# Altium PCB PCB_prob_2024-08-21.pcbdoc
Units mil, origin at the board's own origin, x right, y up, seen from the top; angles counter-clockwise.
Board outline 12910 x 4910 mil, 2 copper layers (Top Layer, Bottom Layer); 57 components, 36 nets, 213 pads, 16 vias.
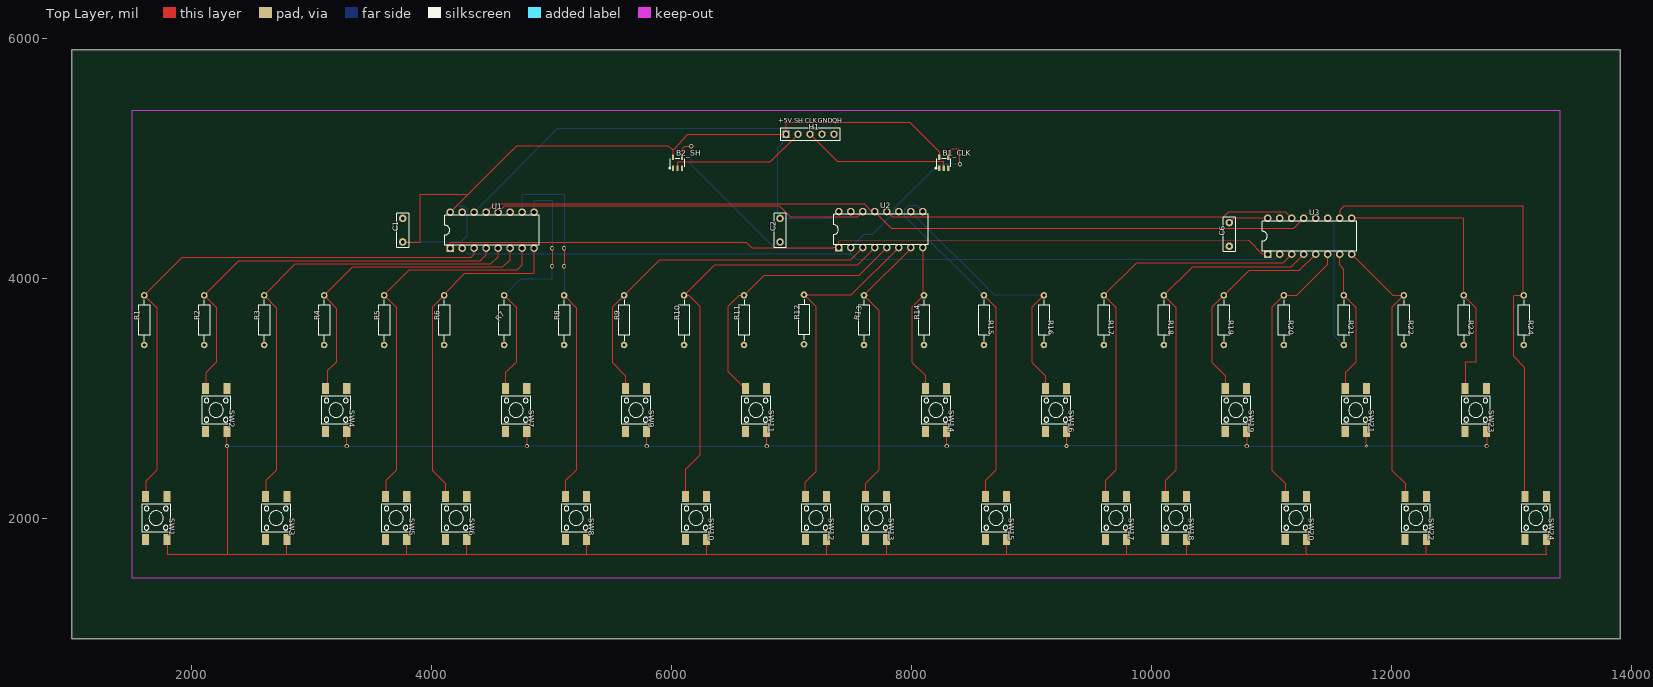
[diagram p0: Top Layer view]
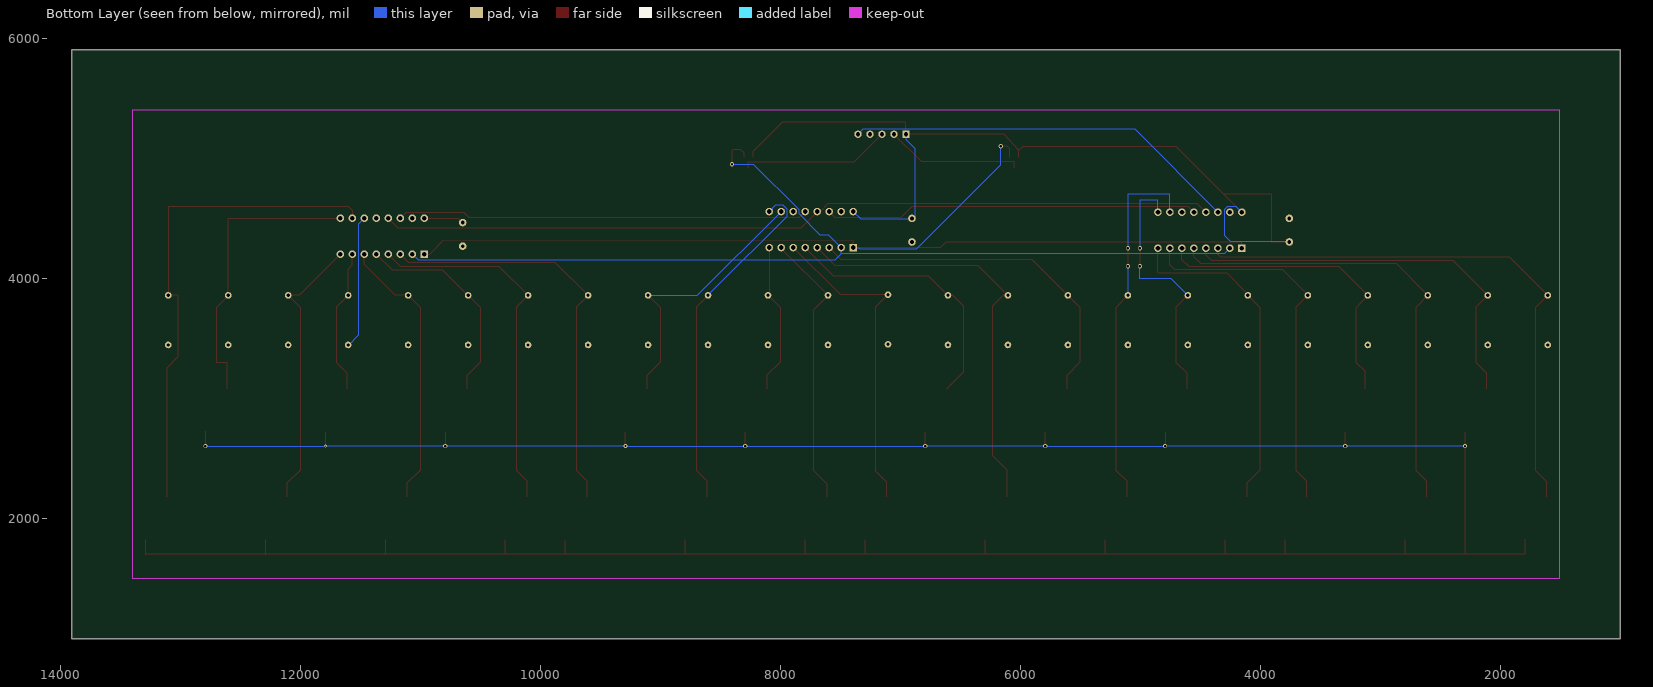
[diagram p1: Bottom Layer view, seen from below]

## Layer stack, top to bottom
Top Layer: signal copper (thickness not stored)
Dielectric: dielectric 12.6, FR-4, Dk 4.8
Bottom Layer: signal copper (thickness not stored)

## Board outline
13910,1000 1000,1000 1000,5910 13910,5910

## Components (designator, comment, footprint, x,y, rotation, side; value= is the part's Value field where it differs from the comment)
B1_CLK "SN74LVC1G125DBVR" SOT-23-5_L3.0-W1.7-P0.95-LS2.8-BL 8270,4967.2 r0 top
B2_SH "SN74LVC1G125DBVR" SOT-23-5_L3.0-W1.7-P0.95-LS2.8-BL 6050.66,4967.2 r0 top
C1 "100nF" CAP-TH_L7.2-W2.5-P5.00-D0.5 3760,4405 r90 top
C2 "100nF" CAP-TH_L7.2-W2.5-P5.00-D0.5 6905,4405 r90 top
C6 "100nF" CAP-TH_L7.2-W2.5-P5.00-D0.5 10650,4370 r90 top
H1 "HDR-F-2.54_1x5" HDR-F-2.54_1X5 7155,5205 r0 top
R1 "110kΩ" RES-TH_BD2.3-L6.5-P10.50-D0.5 1605,3655 r90 top
R2 "110kΩ" RES-TH_BD2.3-L6.5-P10.50-D0.5 2105,3655 r90 top
R3 "110kΩ" RES-TH_BD2.3-L6.5-P10.50-D0.5 2605,3655 r90 top
R4 "110kΩ" RES-TH_BD2.3-L6.5-P10.50-D0.5 3105,3655 r90 top
R5 "110kΩ" RES-TH_BD2.3-L6.5-P10.50-D0.5 3605,3655 r90 top
R6 "110kΩ" RES-TH_BD2.3-L6.5-P10.50-D0.5 4105,3655 r90 top
R7 "110kΩ" RES-TH_BD2.3-L6.5-P10.50-D0.5 4605,3655 r90 top
R8 "110kΩ" RES-TH_BD2.3-L6.5-P10.50-D0.5 5104.99,3655 r90 top
R9 "110kΩ" RES-TH_BD2.3-L6.5-P10.50-D0.5 5605,3655 r270 top
R10 "110kΩ" RES-TH_BD2.3-L6.5-P10.50-D0.5 6105,3655 r270 top
R11 "110kΩ" RES-TH_BD2.3-L6.5-P10.50-D0.5 6605,3655 r270 top
R12 "110kΩ" RES-TH_BD2.3-L6.5-P10.50-D0.5 7105,3660 r270 top
R13 "110kΩ" RES-TH_BD2.3-L6.5-P10.50-D0.5 7605,3655 r270 top
R14 "110kΩ" RES-TH_BD2.3-L6.5-P10.50-D0.5 8105,3655 r270 top
R15 "110kΩ" RES-TH_BD2.3-L6.5-P10.50-D0.5 8605,3655 r270 top
R16 "110kΩ" RES-TH_BD2.3-L6.5-P10.50-D0.5 9105,3655 r270 top
R17 "110kΩ" RES-TH_BD2.3-L6.5-P10.50-D0.5 9605,3655 r270 top
R18 "110kΩ" RES-TH_BD2.3-L6.5-P10.50-D0.5 10105,3655 r270 top
R19 "110kΩ" RES-TH_BD2.3-L6.5-P10.50-D0.5 10605,3655 r270 top
R20 "110kΩ" RES-TH_BD2.3-L6.5-P10.50-D0.5 11105,3655 r270 top
R21 "110kΩ" RES-TH_BD2.3-L6.5-P10.50-D0.5 11604.98,3655 r270 top
R22 "110kΩ" RES-TH_BD2.3-L6.5-P10.50-D0.5 12104.98,3655 r270 top
R23 "110kΩ" RES-TH_BD2.3-L6.5-P10.50-D0.5 12604.98,3655 r270 top
R24 "110kΩ" RES-TH_BD2.3-L6.5-P10.50-D0.5 13104.98,3655 r270 top
SW1 "SW" SW-SMD_4P-L6.0-W6.0-P4.50-LS9.0-2 1705,2005 r270 top
SW2 "SW" SW-SMD_4P-L6.0-W6.0-P4.50-LS9.0-2 2205,2905 r270 top
SW3 "SW" SW-SMD_4P-L6.0-W6.0-P4.50-LS9.0-2 2705,2005 r270 top
SW4 "SW" SW-SMD_4P-L6.0-W6.0-P4.50-LS9.0-2 3205,2905 r270 top
SW5 "SW" SW-SMD_4P-L6.0-W6.0-P4.50-LS9.0-2 3705,2005 r270 top
SW6 "SW" SW-SMD_4P-L6.0-W6.0-P4.50-LS9.0-2 4205,2005 r270 top
SW7 "SW" SW-SMD_4P-L6.0-W6.0-P4.50-LS9.0-2 4705,2905 r270 top
SW8 "SW" SW-SMD_4P-L6.0-W6.0-P4.50-LS9.0-2 5205,2005 r270 top
SW9 "SW" SW-SMD_4P-L6.0-W6.0-P4.50-LS9.0-2 5705,2905 r270 top
SW10 "SW" SW-SMD_4P-L6.0-W6.0-P4.50-LS9.0-2 6205,2005 r270 top
SW11 "SW" SW-SMD_4P-L6.0-W6.0-P4.50-LS9.0-2 6705,2905 r270 top
SW12 "SW" SW-SMD_4P-L6.0-W6.0-P4.50-LS9.0-2 7205,2005 r270 top
SW13 "SW" SW-SMD_4P-L6.0-W6.0-P4.50-LS9.0-2 7705,2005 r270 top
SW14 "SW" SW-SMD_4P-L6.0-W6.0-P4.50-LS9.0-2 8205,2905 r270 top
SW15 "SW" SW-SMD_4P-L6.0-W6.0-P4.50-LS9.0-2 8705,2005 r270 top
SW16 "SW" SW-SMD_4P-L6.0-W6.0-P4.50-LS9.0-2 9205,2905 r270 top
SW17 "SW" SW-SMD_4P-L6.0-W6.0-P4.50-LS9.0-2 9705,2005 r270 top
SW18 "SW" SW-SMD_4P-L6.0-W6.0-P4.50-LS9.0-2 10205,2005 r270 top
SW19 "SW" SW-SMD_4P-L6.0-W6.0-P4.50-LS9.0-2 10705,2905 r270 top
SW20 "SW" SW-SMD_4P-L6.0-W6.0-P4.50-LS9.0-2 11205,2005 r270 top
SW21 "SW" SW-SMD_4P-L6.0-W6.0-P4.50-LS9.0-2 11704.98,2905 r270 top
SW22 "SW" SW-SMD_4P-L6.0-W6.0-P4.50-LS9.0-2 12204.98,2005 r270 top
SW23 "SW" SW-SMD_4P-L6.0-W6.0-P4.50-LS9.0-2 12704.98,2905 r270 top
SW24 "SW" SW-SMD_4P-L6.0-W6.0-P4.50-LS9.0-2 13204.98,2005 r270 top
U1 "SN74HC165N" DIP-16_L19.8-W6.5-P2.54-LS7.6-BL 4505,4405 r0 top
U2 "SN74HC165N" DIP-16_L19.8-W6.5-P2.54-LS7.6-BL 7745,4410 r0 top
U3 "SN74HC165N" DIP-16_L19.8-W6.5-P2.54-LS7.6-BL 11320,4355 r0 top

## Footprints (in the part's own frame and the unit in brackets; to place one, negate y for a bottom-side part, rotate by r counter-clockwise, add the part's x,y. Pads: shape width x height; smd on the part's side, far side on the other; paste and mask are expansions set on the pad)
CAP-TH_L7.2-W2.5-P5.00-D0.5 [mm]
  round 1.6 hole 0.8 paste+0 mask+0.05: 1(-2.5,0) 2(2.5,0)
  silkscreen extent -3.6,-1.25 3.6,1.25
DIP-16_L19.8-W6.5-P2.54-LS7.6-BL [mm]
  rect 1.6x1.6 hole 1 paste+0 mask+0.051: 1(-8.89,-3.81)
  round 1.6 hole 1 paste+0 mask+0.051: 2(-6.35,-3.81) 3(-3.81,-3.81) 4(-1.27,-3.81) 5(1.27,-3.81) 6(3.81,-3.81) 7(6.35,-3.81) 8(8.89,-3.81) 9(8.89,3.81) 10(6.35,3.81) 11(3.81,3.81) 12(1.27,3.81) 13(-1.27,3.81) 14(-3.81,3.81) 15(-6.35,3.81) 16(-8.89,3.81)
  silkscreen extent -10,-3.2 10,3.2
HDR-F-2.54_1X5 [mil]
  rect 62x62 hole 35 paste+0 mask+2: 1(-200,0)
  round 62 hole 35 paste+0 mask+2: 2(-100,0) 3(0,0) 4(100,0) 5(200,0)
  silkscreen extent -250,-50 250,50
RES-TH_BD2.3-L6.5-P10.50-D0.5 [mm]
  round 1.4 hole 0.7 paste+0 mask+0.051: 1(-5.25,0) 2(5.25,0)
  silkscreen extent -4.32,-1.15 4.32,1.15
SOT-23-5_L3.0-W1.7-P0.95-LS2.8-BL [mm]
  rect 0.49x1.157 smd paste+0 mask+0.051: 1(-0.95,-1.154) 2(0,-1.154) 3(0.95,-1.154)
  rect 0.49x1.175 smd paste+0 mask+0.051: 4(0.95,1.154) 5(-0.95,1.154)
  silkscreen extent -1.8,-1.29 1.53,0.85
SW-SMD_4P-L6.0-W6.0-P4.50-LS9.0-2 [mm]
  rect 2.3x1.5 smd paste+0 mask+0.051: 1(-4.55,2.25) 2(4.55,2.25) 3(-4.55,-2.25) 4(4.55,-2.25)
  silkscreen extent -3,-3 3,3

## Via types
v1: diameter 35.43, hole 19.69, Top Layer to Bottom Layer, tented both sides, 15 vias
v2: diameter 24.41, hole 12.2, Top Layer to Bottom Layer, tented both sides, 1 vias

## Nets (pads, with @x,y where several pads share a name; then routed paths per layer and width w, separated by ;. In a path a pad name is that pad's centre, name@x,y a point inside that pad or via, vN(x,y) a via of type N, cw(c..) or ccw(c..) an arc to the next point about the centre after c; other vN are vias at no path point)
CLK: B1_CLK.2 H1.3 | length 1263.5
  Top Layer w10: H1.3 7385,4975 8250,4975 8270,4975 B1_CLK.2
CLK_OUT: B1_CLK.4 U1.2 U2.2 U3.2 | length 8412.5
  Top Layer w10: B1_CLK.4 8307.39,5055 8340,5080 8395,5080 8405,5070 v1(8405,4955)
  Bottom Layer w10: U1.2 4303.08,4206.92 7495,4206.92 ; v1(8405,4955) 8227.1,4955 7850.56,4578 7850.56,4546.02 7673.48,4368.94 7603.94,4368.94 U2.2 7495,4206.92 ; U3.2 11022.56,4157.56 7544.36,4157.56 7495,4206.92
GND_PORT: B1_CLK.1 B1_CLK.3 B2_SH.1 B2_SH.3 C1.2 C2.1 C6.1 H1.4 R1.1 R2.1 R3.1 R4.1 R5.1 R6.1 R7.1 R8.1 R9.2 R10.2 R11.2 R12.2 R13.2 R14.2 R15.2 R16.2 R17.2 R18.2 R19.2 R20.2 R21.2 R22.2 R23.2 R24.2 U1.15 U2.11 U2.15 U3.11 U3.15 | length 1117.6
  Bottom Layer w10: U3.11 11520,4455.01 11520,3528.32 R21.2@11605,3443.31
QH: H1.5 U1.14 | length 3305.6
  Bottom Layer w10: U1.14 5048.94,5248.94 7311.06,5248.94 H1.5
QH#: U1.13 U2.13 U3.13 | length 6962.5
  Top Layer w10: U1.13 4525.42,4625.42 7606.21,4625.42 7671.63,4560 U2.13 7832.64,4422.36 11187.36,4422.36 U3.13
SH/LD#: B2_SH.2 H1.2 | length 1152.8
  Top Layer w10: B2_SH.2 6050.66,4975 6825,4975 H1.2
SH/LD#_OUT: B2_SH.4 U1.1 U2.1 U3.1 | length 8820.8
  Top Layer w10: U1.1 4155,4305 6623.7,4305 6668.7,4260 7350.6,4260 U2.1 7395,4315 10811.58,4319.03 10925.61,4205 U3.1 ; B2_SH.4 6088.06,5083.06 6110,5105 v1(6165,5105)
  Bottom Layer w10: v1(6165,5105) 6165,4949.8 6863.94,4250.86 7341.47,4250.86 7350.61,4260 U2.1
U1: R1.2 SW1.3 U1.3 | length 4702
  Top Layer w10: SW1.3 1616.42,2311.42 1710,2405 1710,3756.69 R1.2 1923.31,4180 4330,4180 4355,4205 U1.3
U1_11: U1.11
U2: R2.2 SW2.3 U1.4 | length 3400.8
  Top Layer w10: SW2.3 2116.42,3216.42 2205,3305 2205,3761.69 R2.2 2393.31,4150 4405,4150 4455,4200 U1.4
U2_14: U1.12 U2.14 | length 3118.7
  Top Layer w10: U1.12 4604.33,4604.33 6900.87,4604.33 6993.31,4511.89 7546.89,4511.89 U2.14
U3: R3.2 SW3.3 U1.5 | length 3909.7
  Top Layer w10: SW3.3 2616.4,2316.4 2705,2405 2705,3756.7 R3.2 2863.31,4125 4495,4125 4555,4185 U1.5
U3_12: U3.12
U3_14: U2.12 U3.14 | length 3432.1
  Top Layer w10: U2.12 7843.42,4511.58 10601.6,4511.58 10643.01,4552.99 11122.01,4552.99 U3.14
U4: R4.2 SW4.3 U1.6 | length 2616.2
  Top Layer w10: SW4.3@3131.41,3084.13 3131.41,3231.41 3205,3305 3205,3755 R4.2 3343.31,4100 4595,4100 4655,4160 U1.6
U5: R5.2 SW5.3 U1.7 | length 3155.6
  Top Layer w10: R5.2@3600,3861.69 3813.31,4075 4715,4075 4755,4115 U1.7 ; R5.2 3705,3761.69 3705,2405 3616.42,2316.42 SW5.3
U6: R6.2 SW6.3 U1.8 | length 2786.9
  Top Layer w10: R6.2 4005,3761.7 4005,2405 4116.42,2293.58 SW6.3 ; R6.2@4110,3876.69 4278.31,4045 4850,4045 4855,4050 U1.8
U7: R7.2 SW7.3 U1.9 | length 2218
  Top Layer w10: R7.2 4705,3761.68 4705,3305 4616.42,3216.42 SW7.3 ; v1(5005,4105) v1(5005,4255)
  Bottom Layer w10: R7.2 4743.3,4000 5005,4000 v1(5005,4105) ; U1.9 4855,4655 5005,4655 v1(5005,4255)
U8: R8.2 SW8.3 U1.10 | length 3097.6
  Top Layer w10: R8.2 5205,3756.68 5205,2405 5116.42,2316.42 SW8.3 ; v1(5105,4105) v1(5105,4255)
  Bottom Layer w10: U1.10 4755,4705 5105,4705 v1(5105,4255) ; R8.2 v1(5105,4105)
U9: R9.1 SW9.3 U2.3 | length 3019.9
  Top Layer w10: SW9.3 5616.42,3193.58 5505,3305 5505,3761.69 R9.1 5903.3,4160 7494.3,4160 U2.3
U10: R10.1 SW10.3 U2.4 | length 3558.6
  Top Layer w10: SW10.3 6115,2405 6115,2410 6235,2530 6235,3770 6143.3,3861.7 R10.1 6356.61,4113.3 7548.3,4113.3 U2.4
U11: R11.1 SW11.3 U2.5 | length 2267.4
  Top Layer w10: SW11.3 6475,3225.55 6475,3770 6566.69,3861.69 R11.1 6768.12,4024.81 7559.81,4024.81 U2.5
U12: R12.1 SW12.3 U2.6 | length 2715.5
  Top Layer w10: SW12.3 7115,2185.55 7115,2305 7205,2395 7205,3766.69 R12.1 7500,3865 U2.6
U13: R13.1 SW13.3 U2.7 | length 2336.2
  Top Layer w10: SW13.3 7616.42,2291.42 7730,2405 7730,3736.69 R13.1 7995,4251.69 U2.7
U14: R14.1 SW14.3 U2.8 | length 1267.6
  Top Layer w10: U2.8 8095,3871.69 R14.1 8005,3761.7 8005,3305 8115,3195 8115,3190 8116.42,3188.58 SW14.3
U15: R15.1 SW15.3 U2.9 | length 2930.5
  Top Layer w10: R15.1 8705,3761.69 8705,2405 8616.42,2316.42 SW15.3
  Bottom Layer w10: U2.9 8044.13,4610.87 7977.06,4610.87 7945,4578.81 7945,4521.69 8559.97,3906.72 R15.1
U16: R16.1 SW16.3 U2.10 | length 2264.4
  Top Layer w10: R16.1 9005,3761.69 9005,3305 9116.42,3193.58 SW16.3
  Bottom Layer w10: U2.10 8693.31,3861.69 9063.45,3861.69 R16.1
U17: R17.1 SW17.3 U3.3 | length 3462.9
  Top Layer w10: SW17.3 9616.42,2316.42 9705,2405 9705,3761.69 R17.1 9877.04,4133.73 11098.73,4133.73 U3.3
U18: R18.1 SW18.3 U3.4 | length 3062.9
  Top Layer w10: SW18.3 10116.42,2316.42 10205,2405 10205,3761.69 R18.1 10344.92,4101.61 11166.61,4101.61 U3.4
U19: R19.1 SW19.3 U3.5 | length 1772.3
  Top Layer w10: SW19.3 10616.42,3193.58 10505,3305 10505,3761.69 R19.1 10606.69,3861.69 10815,4070 11235,4070 U3.5
U20: R20.1 SW20.3 U3.6 | length 2322.1
  Top Layer w10: SW20.3 11116.42,2293.58 11005,2405 11005,3761.69 R20.1 11211.69,3861.69 11470,4120 U3.6
U21: R21.1 SW21.3 U3.7 | length 1213.5
  Top Layer w10: U3.7 11570,4115 11605,4080 R21.1 11705,3761.69 11705,3305 11616.42,3216.42 SW21.3
U22: R22.1 SW22.3 U3.8 | length 2342.3
  Top Layer w10: U3.8 12013.31,3861.69 R22.1 12005,3761.69 12005,2405 12116.42,2293.58 SW22.3
U23: R23.1 SW23.3 U3.9 | length 2484.5
  Top Layer w10: U3.9 12600,4505 12605,4500 12605,3856.69 12705,3756.69 12705,3305 12615,3305 12616.42,3293.58 SW23.3
U24: R24.1 SW24.3 U3.10 | length 4155.8
  Top Layer w10: U3.10 11570,4570 11605,4605 13100,4605 13100,3866.7 R24.1 13028.31,3861.69 13020,3860 13020,3355 13115,3260 13115,2185.55 SW24.3
VCC_PORT: B1_CLK.5 B2_SH.5 C1.1 C2.2 C6.2 H1.1 SW1.2 SW2.2 SW3.2 SW4.2 SW5.2 SW6.2 SW7.2 SW8.2 SW9.2 SW10.2 SW11.2 SW12.2 SW13.2 SW14.2 SW15.2 SW16.2 SW17.2 SW18.2 SW19.2 SW20.2 SW21.2 SW22.2 SW23.2 SW24.2 U1.16 U2.16 U3.16 | length 34010.7
  Top Layer w10: SW1.2 1795,1824.45 1795,1705 2795,1705 ; SW2.2 v1@2293.58,2605 ; 2295.99,1705 v1@2295.99,2602.59 ; SW3.2 2793.58,1706.42 2795,1705 ; v1(3293.58,2605) SW4.2 ; C1.1 3761.6,4305 3905,4305 3905.4,4704.6 4304.6,4704.6 ; SW5.2 3793.58,1706.42 3795,1705 ; U1.16 4705,5105 5977.5,5105 6013.3,5070 ; SW6.2 4295,1705 ; SW7.2 4795,2724.45 v1(4795,2605) ; SW8.2 5295,1705 ; SW9.2 5793.58,2606.42 v1(5795,2605) ; B2_SH.5 6013.26,5070 6135,5205 H1.1 6955,5305 7985,5305 8232.6,5057.4 B1_CLK.5 ; SW10.2 6293.58,1706.42 6295,1705 ; SW11.2 6793.58,2606.42 v1(6795,2605) ; SW12.2 7293.58,1706.42 7295,1705 ; SW13.2 7793.58,1708.58 7790,1705 ; SW14.2 8293.58,2606.42 v1(8295,2605) ; SW15.2 8793.58,1706.42 8795,1705 ; v1(9293.58,2606.42) SW16.2 ; SW17.2@9793.58,1820.87 9793.58,1706.42 9795,1705 ; SW18.2 10293.58,1706.42 10295,1705 ; C6.2 10686.57,4505 U3.16 ; SW19.2 v1@10794,2605 ; SW20.2 11293.58,1711.42 11300,1705 10295,1705 ; 11297.2,1705 12295,1705 ; SW21.2 11793.58,2606.42 v2(11795,2605) ; SW22.2 12293.58,1706.42 12295,1705 ; SW23.2 12795,2724.45 v1(12795,2605) ; SW24.2 13293.58,1706.42 13295,1705 12295,1705 ; v1@2293.58,2605 v1@2295.99,2602.59 ; v1@2293.58,2605 v1@2295.99,2602.59 ; 2795,1705 3795,1705 ; 3795,1705 4295,1705 ; 4295,1705 5295,1705 ; 5295,1705 6295,1705 ; 6295,1705 7295,1705 ; 7295,1705 7790,1705 ; 7790,1705 8795,1705 ; 8795,1705 8800,1705 9795,1705 ; 9795,1705 9800,1705 10295,1705
  Bottom Layer w10: v1@2295.99,2602.59 2298.4,2605 v1(3293.58,2605) v1(4795,2605) v1(5795,2605) v1(6795,2605) v1(8295,2605) 9292.16,2605 v1(9293.58,2606.42) 10793.58,2606.42 v1(10795,2605) v2(11795,2605) v1(12795,2605) ; C1.1 4246.31,4306.58 4299.55,4359.82 4299.55,4579.4 4274.42,4604.53 4204.53,4604.53 U1.16 ; C2.2@6883.3,4498.4 6883.3,5089.4 6955,5161.1 H1.1 ; C2.2@6883.33,4498.43 7333.43,4498.43 U2.16
  other v1: 2295,2605
pads on no net: SW1.1 SW1.4 SW2.1 SW2.4 SW3.1 SW3.4 SW4.1 SW4.4 SW5.1 SW5.4 SW6.1 SW6.4 SW7.1 SW7.4 SW8.1 SW8.4 SW9.1 SW9.4 SW10.1 SW10.4 SW11.1 SW11.4 SW12.1 SW12.4 SW13.1 SW13.4 SW14.1 SW14.4 SW15.1 SW15.4 SW16.1 SW16.4 SW17.1 SW17.4 SW18.1 SW18.4 SW19.1 SW19.4 SW20.1 SW20.4 SW21.1 SW21.4 SW22.1 SW22.4 SW23.1 SW23.4 SW24.1 SW24.4

## Silkscreen, mask and mechanical layers (free items; w line width, h text height)
Top Overlay:
  text "+5V" at 6890,5300.31 h39.37
  text "SH" at 7025,5300.31 h39.37
  text "CLK" at 7110,5300.31 h39.37
  text "GND" at 7220,5300.31 h39.37
  text "QH" at 7340,5300.31 h39.37